# Altium PCB Copy of PCB2.PcbDoc
Units mil, origin at the board's own origin, x right, y up, seen from the top; angles counter-clockwise.
Board outline 6000 x 4000 mil, 2 copper layers (Top Layer, Bottom Layer); 21 components, 29 nets, 114 pads, 3 vias.
Unrouted connection lines stored in the file: 7.
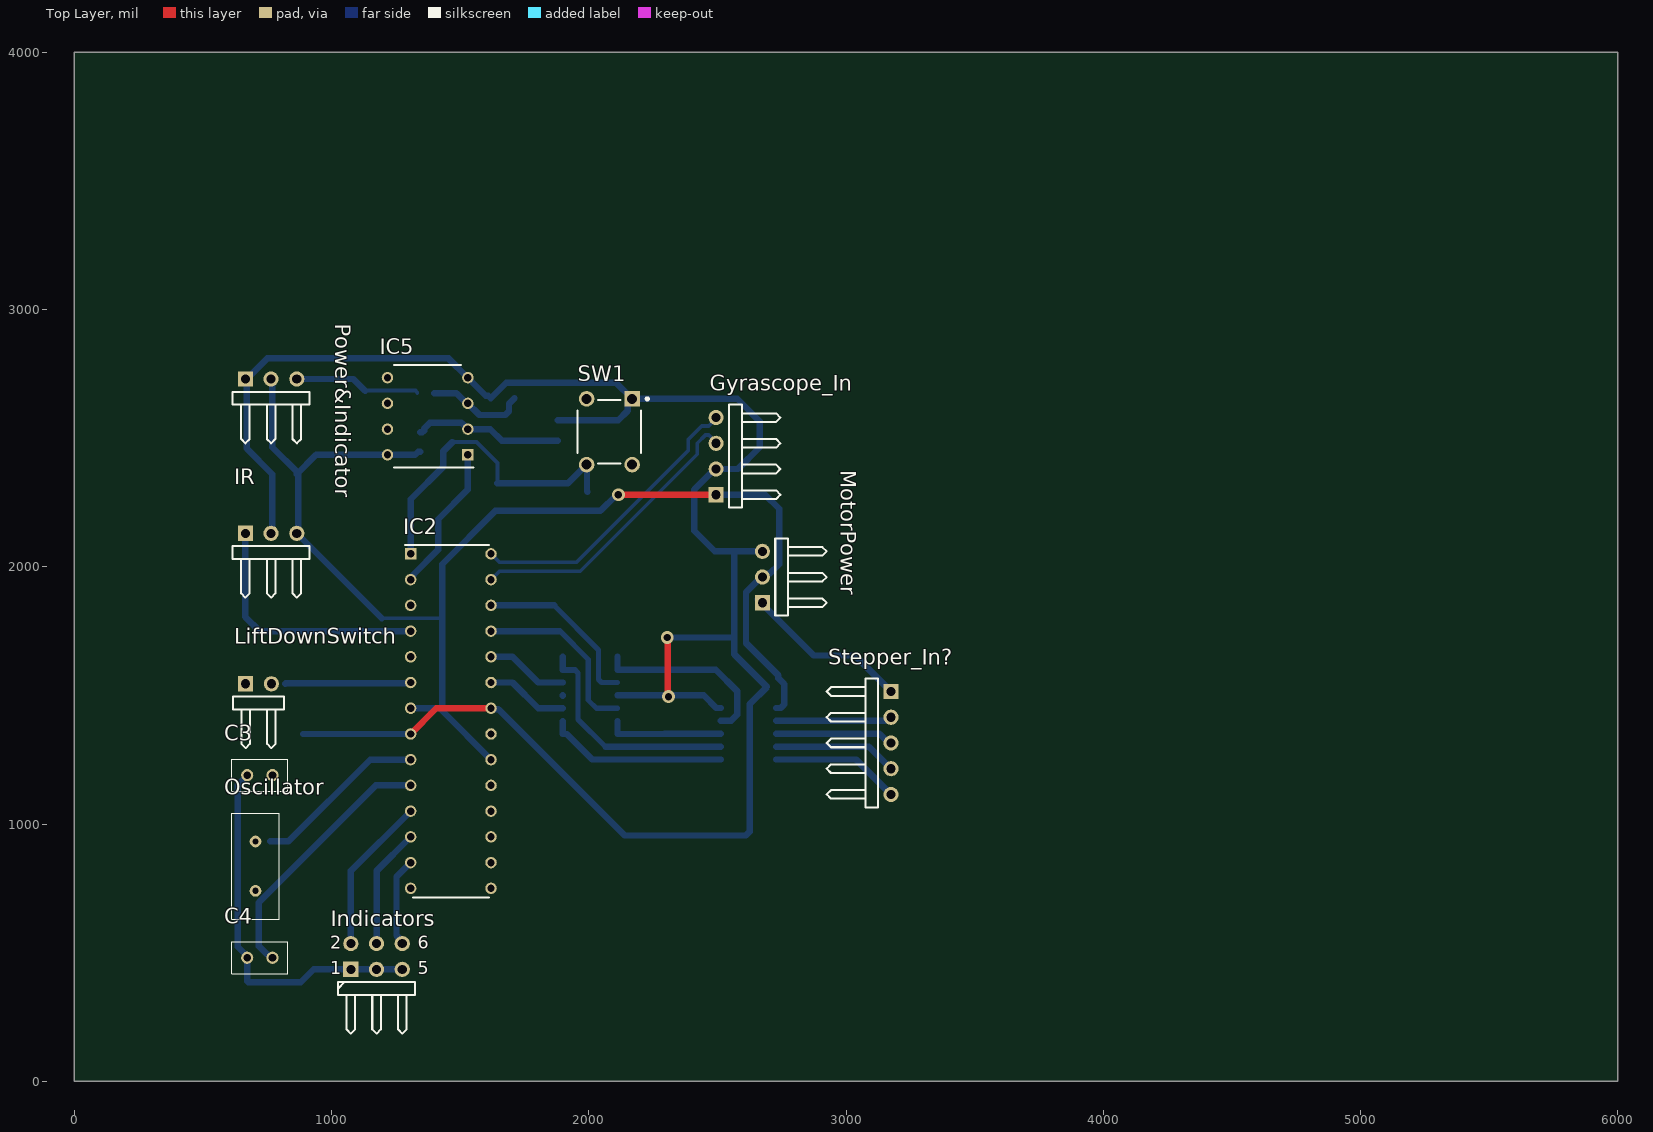
[diagram p0: Top Layer view]
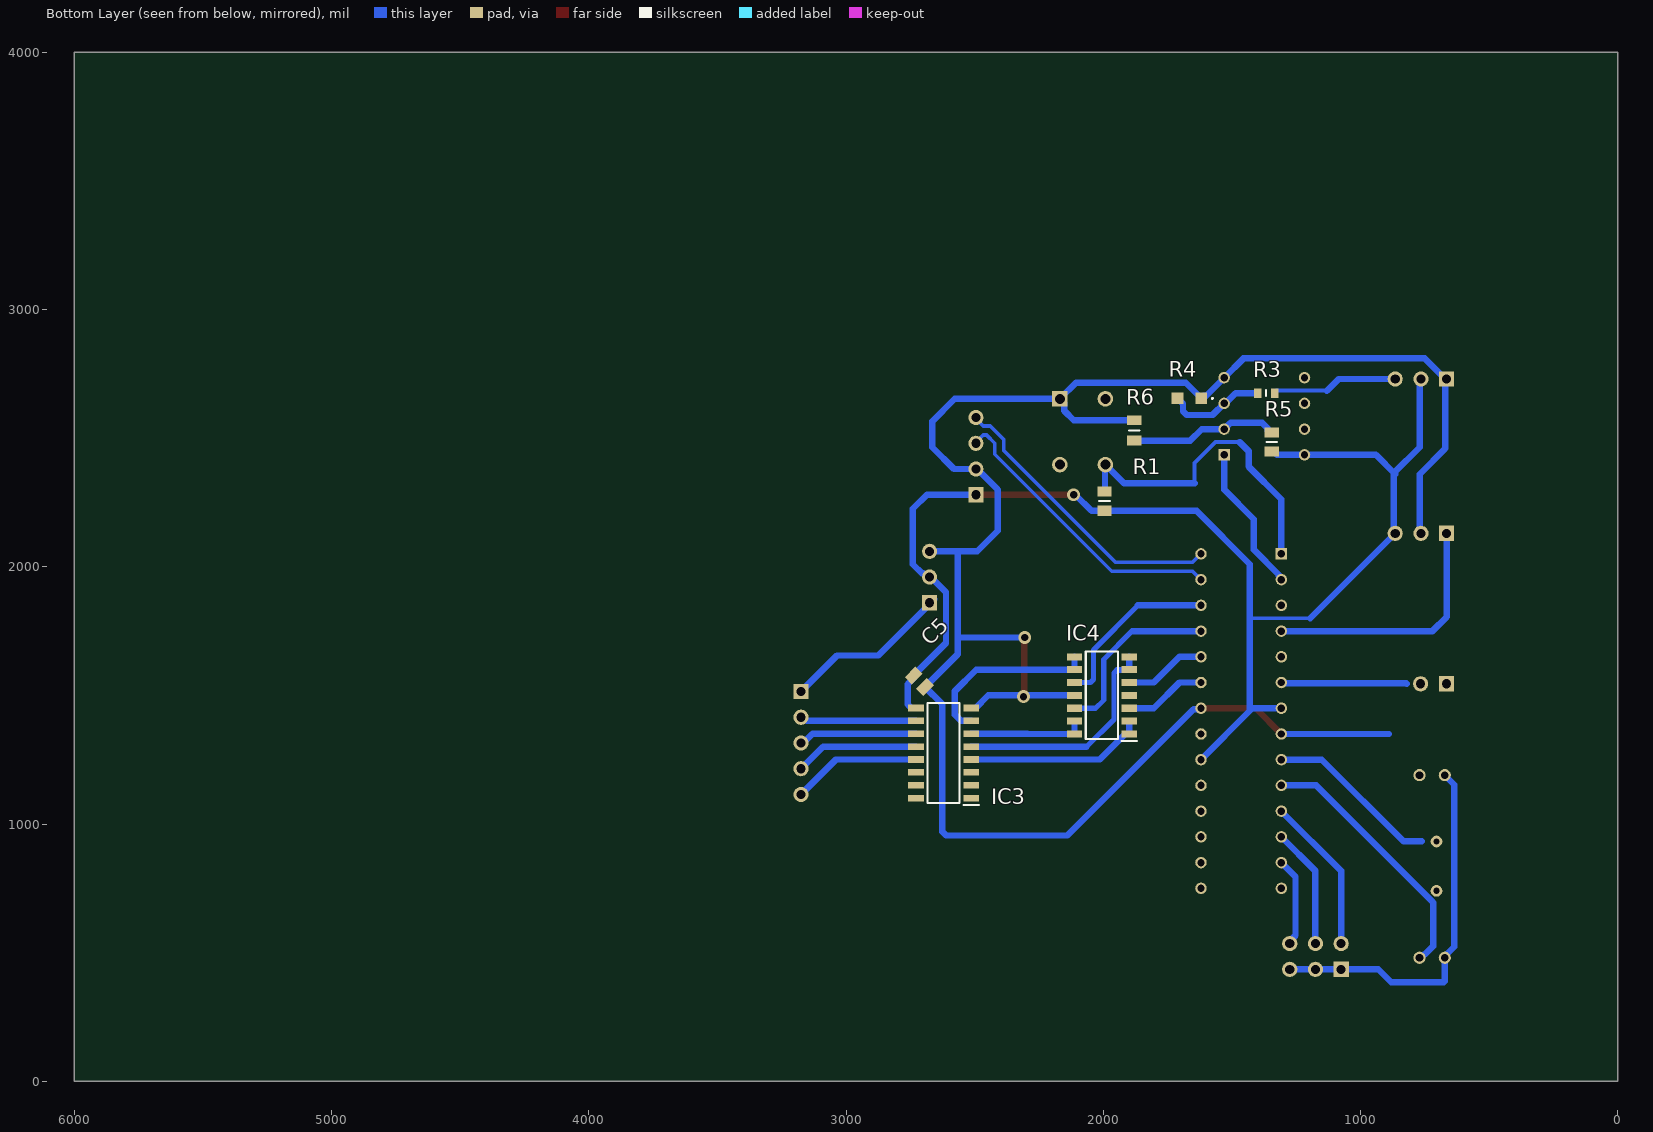
[diagram p1: Bottom Layer view, seen from below]

## Layer stack, top to bottom
Top Solder: solder mask 0.4, Solder Resist, Dk 3.5
Top Layer: signal copper 1.4
Dielectric 1: dielectric 12.6, FR-4, Dk 4.8
Bottom Layer: signal copper 1.4
Bottom Solder: solder mask 0.4, Solder Resist, Dk 3.5

## Board outline
0,0 6000,0 6000,4000 0,4000

## Design rules (kind name [scope] priority, off if disabled: settings)
Clearance [All] p1: gap=20 ignorepadtopadclearanceinfootprint=FALSE
DiffPairsRouting [All] p1: maxlimit=20 minlimit=20 mostfreqgap=20 toplayer_minwidth=15 toplayer_maxwidth=15 toplayer_prefwidth=15 bottomlayer_minwidth=15 bottomlayer_maxwidth=15 bottomlayer_prefwidth=15 maxuncoupledlength=500
PolygonConnect [All] p1: connectstyle=Relief reliefconductorwidth=10 reliefentries=4 polygonreliefangle="90 Angle" airgapwidth=10
RoutingVias [All] p1: holewidth=28 width=50 viastyle="Through Hole" minholewidth=28 minwidth=50 maxholewidth=28 maxwidth=50
SolderMaskExpansion [All] p1: expansion=4 istentingtop=FALSE
Width [All] p1: maxlimit=30 minlimit=10 preferedwidth=25
29 further rules are at their usual default settings.

## Classes and differential pairs
differential pair class I2C: I2C
differential pair I2C: +I2C_P -I2C_N

## Components (designator, comment, footprint, x,y, rotation, side; value= is the part's Value field where it differs from the comment)
C3 "RDE5C2J220J2M1H03A" RCE5C1H104J2A2H03B 672.09,1190 r0 top
C4 "RDE5C2J220J2M1H03A" RCE5C1H104J2A2H03B 672.09,480 r0 top
C5 "C0805C912G4HACTU" CAPC2012X88N 2715,1555 r45 bottom
Gyrascope_In "Header 4H" HDR1X4H 2495,2280 r90 top
IC2 "ATMEGA328P-PN" DIP794W53P254L3467H457Q28N 1463.74,1400 r0 top
IC3 "ULN2003ADR2G" SOIC127P600X175-16N 2620.86,1275.86 r0 bottom
IC4 "LM324WDT" SOIC127P600X175-14N 2005,1500 r0 bottom
IC5 "TL072ACP" DIP794W53P254L959H508Q8N 1373.7,2585 r180 top
Indicators "Header 3X2H" HDR2X3H 1075,435 r0 top
IR "Header 3H" HDR1X3H 665,2130 r0 top
LiftDownSwitch "Header 2H" HDR1X2H 666.06,1545 r0 top
MotorPower "Header 3H" HDR1X3H 2675,1860 r90 top
Oscillator "ECS-160-18-4X-CKM" ECS160184XCKM 704.57,932.13 r270 top
Power&Indicator "Header 3H" HDR1X3H 665,2730 r0 top
R1 "" RESC2012X60N 1995,2255 r90 bottom
R3 "SDR03EZPF1001" RESC1608X55N 1366.53,2675 r180 bottom
R4 "ERA-6ARB1401V" ERA6A_(0805) 1665,2655 r0 bottom
R5 "CHP0805AFX-1001ELF" RESC2012X60N 1345,2485 r270 bottom
R6 "CRCW08052K00FKEBC" RESC2012X50N 1880,2530 r90 bottom
Stepper_In? "Header 5H" HDR1X5H 3175,1515 r270 top
SW1 "" FP-2-1825910-6-MFG 2080,2525 r0 top

## Footprints (in the part's own frame and the unit in brackets; to place one, negate y for a bottom-side part, rotate by r counter-clockwise, add the part's x,y. Pads: shape width x height; smd on the part's side, far side on the other; paste and mask are expansions set on the pad)
CAPC2012X88N [mm]
  rect 1.02x1.47 smd: 1(-0.8,0) 2(0.8,0)
  body extent -1,-0.62 1,0.62, height 0.88
DIP794W53P254L959H508Q8N [mm]
  rect 1.13x1.13 hole 0.73: 1(-3.97,3.81)
  round 1.13 hole 0.73: 2(-3.97,1.27) 3(-3.97,-1.27) 4(-3.97,-3.81) 5(3.97,-3.81) 6(3.97,-1.27) 7(3.97,1.27) 8(3.97,3.81)
  silkscreen extent -4.54,-5.08 3.3,5.08, body extent -4.1,-4.64 4.1,4.64, height 4.21
DIP794W53P254L3467H457Q28N [mil]
  rect 44.61x44.61 hole 28.86: 1(-156.26,650)
  round 44.61 hole 28.86: 2(-156.26,550) 3(-156.26,450) 4(-156.26,350) 5(-156.26,250) 6(-156.26,150) 7(-156.26,50) 8(-156.26,-50) 9(-156.26,-150) 10(-156.26,-250) 11(-156.26,-350) 12(-156.26,-450) 13(-156.26,-550) 14(-156.26,-650) 15(156.26,-650) 16(156.26,-550) 17(156.26,-450) 18(156.26,-350) 19(156.26,-250) 20(156.26,-150) 21(156.26,-50) 22(156.26,50) 23(156.26,150) 24(156.26,250) 25(156.26,350) 26(156.26,450) 27(156.26,550) 28(156.26,650)
  silkscreen extent -179,-685 147,685, body extent -161,-682 161,683, height 180
ECS160184XCKM [mm]
  round 1.155 hole 0.63: 1(0,0) 2(4.88,0)
  silkscreen extent -2.81,-2.33 7.69,2.33, body extent -3.23,-2.32 8.12,2.32, height 3.5
ERA6A_(0805) [mm]
  rect 1.15x1.15 smd: 1(-1.175,0) 2(1.175,0)
  silkscreen extent -2.32,-0.05 -2.22,0.05, body extent -1,-0.63 1,0.63, height 0.5
FP-2-1825910-6-MFG [mm]
  rect 1.54x1.54 hole 0.99 paste-1000 mask+0: 1(2.25,3.25)
  round 1.54 hole 0.99 paste-1000 mask+0: 2(2.25,-3.25) 3(-2.25,3.25) 4(-2.25,-3.25)
  silkscreen extent -3.14,-3.14 3.87,3.37, body extent -3.24,-4.12 3.24,4.12, height 0.25
HDR1X2H [mm] "Connector; Header; 2 Position; Right Angle"
  rect 1.5x1.5 hole 0.9: 1(0,0)
  round 1.5 hole 0.9: 2(2.54,0)
  silkscreen extent -1.27,-6.35 3.81,-1.27, body extent -1.4,-3.17 3.68,3.17, height 10.16
HDR1X3H [mm] "Connector; Header; 3 Position; Right Angle"
  rect 1.5x1.5 hole 0.9: 1(0,0)
  round 1.5 hole 0.9: 2(2.54,0) 3(5.08,0)
  silkscreen extent -1.27,-6.35 6.35,-1.27, body extent -1.14,-2.29 6.48,4.06, height 10.18
HDR1X4H [mm] "Connector; Header; 4 Position; Right Angle"
  rect 1.5x1.5 hole 0.9: 1(0,0)
  round 1.5 hole 0.9: 2(2.54,0) 3(5.08,0) 4(7.62,0)
  silkscreen extent -1.27,-6.35 8.89,-1.27
HDR1X5H [mm] "Connector; Header; 5 Position; Right Angle"
  rect 1.5x1.5 hole 0.9: 1(0,0)
  round 1.5 hole 0.9: 2(2.54,0) 3(5.08,0) 4(7.62,0) 5(10.16,0)
  silkscreen extent -1.27,-6.35 11.43,-1.27
HDR2X3H [mm] "Connector; Header; 3x2 Position; Right Angle"
  rect 1.5x1.5 hole 0.9: 1(0,0)
  round 1.5 hole 0.9: 2(0,2.54) 3(2.54,0) 4(2.54,2.54) 5(5.08,0) 6(5.08,2.54)
  silkscreen extent -1.27,-6.35 6.35,-1.27, body extent -0.4,-0.69 5.6,3.31, height 4.01
RCE5C1H104J2A2H03B [mm]
  round 1.2 hole 0.75: 1(0,0) 2(2.5,0)
  silkscreen extent -1.5,-1.58 4,1.58, body extent -1.5,-1.5 4,1.65, height 4.5
RESC1608X55N [mm]
  rect 0.75x0.95 smd: 1(-0.85,0) 2(0.85,0)
  silkscreen extent 0,-0.3 0,0.3, body extent -0.8,-0.4 0.8,0.4, height 0.55
RESC2012X50N [mm]
  rect 0.95x1.45 smd: 1(-1,0) 2(1,0)
  silkscreen extent 0,-0.53 0,0.53, body extent -1.02,-0.63 1.02,0.63, height 0.5
RESC2012X60N [mm]
  rect 1x1.4 smd: 1(-0.95,0) 2(0.95,0)
  silkscreen extent 0,-0.53 0,0.53, body extent -1,-0.63 1,0.63, height 0.6
SOIC127P600X175-14N [mm]
  rect 1.525x0.7 smd: 1(-2.712,3.81) 2(-2.712,2.54) 3(-2.712,1.27) 4(-2.712,0) 5(-2.712,-1.27) 6(-2.712,-2.54) 7(-2.712,-3.81) 8(2.712,-3.81) 9(2.712,-2.54) 10(2.712,-1.27) 11(2.712,0) 12(2.712,1.27) 13(2.712,2.54) 14(2.712,3.81)
  silkscreen extent -3.47,-4.33 1.6,4.51, body extent -3,-4.33 3,4.33, height 1.75
SOIC127P600X175-16N [mm]
  rect 1.55x0.65 smd: 1(-2.725,4.445) 2(-2.725,3.175) 3(-2.725,1.905) 4(-2.725,0.635) 5(-2.725,-0.635) 6(-2.725,-1.905) 7(-2.725,-3.175) 8(-2.725,-4.445) 9(2.725,-4.445) 10(2.725,-3.175) 11(2.725,-1.905) 12(2.725,-0.635) 13(2.725,0.635) 14(2.725,1.905) 15(2.725,3.175) 16(2.725,4.445)
  silkscreen extent -3.5,-4.95 1.6,5.12, body extent -3,-4.95 3,4.95, height 1.75

## Part data
C3 C4: "Capacitor", Manufacturer_Name="Murata Electronics", Mouser Part Number=81-RDE5C2J220J2M1H3A, Datasheet Link=https://psearch.en.murata.com/capacitor/product/RDE5C2J220J2M1H03A.html, Height=5.5mm, Manufacturer_Part_Number=RDE5C2J220J2M1H03A, Mouser Price/Stock=https://www.mouser.co.uk/ProductDetail/Murata-Electronics/RDE5C2J220J2M1H03A?qs=5aG0NVq1C4wmVHtRKJ01XA%3D%3D
C5: "Capacitor", Manufacturer_Name=Kemet, Mouser Part Number=80-C0805C912G4HACTU, Datasheet Link=https://www.kemet.com/specsheet/C0805C912G4HACTU, Height=0.88mm, Manufacturer_Part_Number=C0805C912G4HACTU, Mouser Price/Stock=https://www.mouser.co.uk/ProductDetail/KEMET/C0805C912G4HACTU?qs=W0yvOO0ixfHJmyB%252BYCP7IQ%3D%3D
Gyrascope_In: "Header, 4-Pin, Right Angle", LatestRevisionDate=17-Jul-2002, LatestRevisionNote="Re-released for DXP Platform.", Publisher="Altium Limited"
IC2: "Integrated Circuit", Manufacturer_Name=Microchip, Mouser Part Number=556-ATMEGA328P-PN, Arrow Part Number=ATMEGA328P-PN, Arrow Price/Stock=https://www.arrow.com/en/products/atmega328p-pn/microchip-technology?region=nac, Datasheet Link=https://datasheet.datasheetarchive.com/originals/distributors/Datasheets_SAMA/81e6b951babeaaddc9de6b0e081ba8bf.pdf, Height=4.572mm, Manufacturer_Part_Number=ATMEGA328P-PN, Mouser Price/Stock=https://www.mouser.co.uk/ProductDetail/Microchip-Technology-Atmel/ATMEGA328P-PN?qs=6Dg1WZIWLC4IRXxsq4v5tA%3D%3D
IC3: "Integrated Circuit", Manufacturer_Name="ON Semiconductor", Mouser Part Number=863-ULN2003ADR2G, Arrow Part Number=ULN2003ADR2G, Arrow Price/Stock=https://www.arrow.com/en/products/uln2003adr2g/on-semiconductor?region=europe, Datasheet Link=http://www.onsemi.com/pub/Collateral/ULN2003A-D.PDF, Height=1.75mm, Manufacturer_Part_Number=ULN2003ADR2G, Mouser Price/Stock=https://www.mouser.co.uk/ProductDetail/onsemi/ULN2003ADR2G?qs=t2BMfLoP1KRgd83C6tnDAg%3D%3D
IC4: "Integrated Circuit", Manufacturer_Name=STMicroelectronics, Mouser Part Number=511-LM324WDT, Datasheet Link=https://co.mouser.com/datasheet/2/389/lm224a-1849701.pdf, Height=1.75mm, Manufacturer_Part_Number=LM324WDT, Mouser Price/Stock=https://www.mouser.co.uk/ProductDetail/STMicroelectronics/LM324WDT?qs=sjzR5wbTsNodE9OFOWodlw%3D%3D
IC5: "Integrated Circuit", Manufacturer_Name="Texas Instruments", Mouser Part Number=595-TL072ACP, Arrow Part Number=TL072ACP, Arrow Price/Stock=https://www.arrow.com/en/products/tl072acp/texas-instruments?region=nac, Datasheet Link=http://www.ti.com/lit/ds/symlink/tl071a.pdf, Height=5.08mm, Manufacturer_Part_Number=TL072ACP, Mouser Price/Stock=https://www.mouser.co.uk/ProductDetail/Texas-Instruments/TL072ACP?qs=0OT4q4QBUTLFvIZ%252B%2FvrwoQ%3D%3D
Indicators: "Header, 3-Pin, Dual row, Right Angle", LatestRevisionDate=17-Jul-2002, LatestRevisionNote="Re-released for DXP Platform.", Publisher="Altium Limited"
IR MotorPower Power&Indicator: "Header, 3-Pin, Right Angle", LatestRevisionDate=17-Jul-2002, LatestRevisionNote="Re-released for DXP Platform.", Publisher="Altium Limited"
LiftDownSwitch: "Header, 2-Pin, Right Angle", LatestRevisionDate=17-Jul-2002, LatestRevisionNote="Re-released for DXP Platform.", Publisher="Altium Limited"
Oscillator: "Crystal or Oscillator", Manufacturer_Name=ECS, Mouser Part Number=520-ECS160-18-4X-CKM, Arrow Part Number=ECS-160-18-4X-CKM, Arrow Price/Stock=https://www.arrow.com/en/products/ecs-160-18-4x-ckm/ecs-international?region=nac, Datasheet Link=https://www.mouser.be/datasheet/2/122/hc-49usx-791.pdf, Height=3.5mm, Manufacturer_Part_Number=ECS-160-18-4X-CKM, Mouser Price/Stock=https://www.mouser.co.uk/ProductDetail/ECS/ECS-160-18-4X-CKM?qs=7MVldsJ5UawYqyimirccKw%3D%3D
R1: library part CHP0805-FX-1002ELF, "Resistor", Manufacturer_Name=Bourns, Mouser Part Number=652-CHP0805FX1002ELF, Datasheet Link=https://ms.componentsearchengine.com/Datasheets/1/CHP0805-FX-1002ELF.pdf, Height=0.6mm, Manufacturer_Part_Number=CHP0805-FX-1002ELF, Mouser Price/Stock=https://www.mouser.co.uk/ProductDetail/Bourns/CHP0805-FX-1002ELF?qs=lc2O%252BfHJPVaDI6gsPdDtfw%3D%3D
R3: "Resistor", Manufacturer_Name="ROHM Semiconductor", Mouser Part Number=755-SDR03EZPF1001, Datasheet Link=https://mouser.componentsearchengine.com/Datasheets/1/SDR03EZPF1001.pdf, Height=0.55mm, Manufacturer_Part_Number=SDR03EZPF1001, Mouser Price/Stock=https://www.mouser.co.uk/ProductDetail/ROHM-Semiconductor/SDR03EZPF1001?qs=byeeYqUIh0NXXxDsimC7bA%3D%3D
R4: "Resistor", Manufacturer_Name=Panasonic, Mouser Part Number=667-ERA-6ARB1401V, Datasheet Link=http://industrial.panasonic.com/cdbs/www-data/pdf/RDM0000/AOA0000C307.pdf, Height=0.6mm, Manufacturer_Part_Number=ERA-6ARB1401V, Mouser Price/Stock=https://www.mouser.com/Search/Refine.aspx?Keyword=667-ERA-6ARB1401V
R5: "Resistor", Manufacturer_Name=Bourns, Mouser Part Number=652-CHP0805AFX1001EL, Arrow Part Number=CHP0805AFX-1001ELF, Arrow Price/Stock=https://www.arrow.com/en/products/chp0805afx-1001elf/bourns?region=nac, Datasheet Link=https://www.mouser.com/datasheet/2/54/chp-a-1858677.pdf, Height=0.6mm, Manufacturer_Part_Number=CHP0805AFX-1001ELF, Mouser Price/Stock=https://www.mouser.co.uk/ProductDetail/Bourns/CHP0805AFX-1001ELF?qs=BJlw7L4Cy7%2F%2FdiZX3l7oWQ%3D%3D
R6: "Resistor", Manufacturer_Name=Vishay, Mouser Part Number=71-CRCW08052K00FKEBC, Arrow Part Number=CRCW08052K00FKEBC, Arrow Price/Stock=https://www.arrow.com/en/products/crcw08052k00fkebc/vishay?region=nac, Datasheet Link=https://www.arrow.com/en/products/crcw08052k00fkebc/vishay?region=nac, Height=0.5mm, Manufacturer_Part_Number=CRCW08052K00FKEBC, Mouser Price/Stock=https://www.mouser.co.uk/ProductDetail/Vishay-Dale/CRCW08052K00FKEBC?qs=wd5RIQLrsJimvZ2z7rs9jQ%3D%3D
Stepper_In?: "Header, 5-Pin, Right Angle", LatestRevisionDate=17-Jul-2002, LatestRevisionNote="Re-released for DXP Platform.", Publisher="Altium Limited"
SW1: library part CMP-03407-000025-1, "SWITCH TACTILE SPST-NO 0.05A 24V", Actuator Color=Brown, Contact Current Rating=50mA, Max Operating Temperature=85°C, Min Operating Temperature=-35°C, Operating Force=100gf, Voltage Rating (DC)=24V, Actuator Length=0.37inch, Actuator Material=Nylon, Actuator Type=Standard, Contact Material="Copper Alloy", Contact Plating=Silver, ELV=Compliant, Illumination Type=Non-Illuminated, Lead Free="Lead Free", Length=5.99mm, Max Current Rating=50mA, Mechanical Life=100000Cycles, Mount="Through Hole", Orientation=Straight, Packaging="Loose Piece", RoHS Compliant=Yes, Series=FSMJ, Switch Function=Off-Mom, Switch Travel=0.25mm, Termination="PC Pin", Throw Configuration=SPST, Type=Switch

## Via types
v1: diameter 50, hole 28, Top Layer to Bottom Layer, 3 vias

## Nets (pads, with @x,y where several pads share a name; then routed paths per layer and width w, separated by ;. In a path a pad name is that pad's centre, name@x,y a point inside that pad or via, vN(x,y) a via of type N, cw(c..) or ccw(c..) an arc to the next point about the centre after c; other vN are vias at no path point)
5V_DC: C5.2 Gyrascope_In.1 IC2.7 IC2.20 IC3.9 IC4.4 IC5.8 IR.3 MotorPower.2 Power&Indicator.2 R1.1 R5.2 | length 5205.2
  Top Layer w25: v1(2115,2280) Gyrascope_In.1
  Bottom Layer w15: 1195,1800 1430,1800
  Bottom Layer w25: Power&Indicator.2@770,2730 770,2465 870,2365 870,2135 IR.3 1195,1800 ; 865,2360 940,2435 IC5.8 1324.53,2435 1337.13,2447.6 R5.2 ; IC2.7 1420,1450 1430,1440 ; IC2.20 1430,1440 ; IC4.4 IC4.4@1899.51,1498.72 ; v1(2115,2280) 2108.24,2280 2045.41,2217.18 1637.18,2217.18 1430,2010 1430,1800 1430,1440 ; Gyrascope_In.1 2685,2280 2740,2225 2740,2010 2704.9,1974.9 2699.11,1974.9 2682.5,1958.28 2682.5,1952.5 MotorPower.2@2673.8,1952.5 ; MotorPower.2 2669.98,1960 2611.27,1901.29 2611.27,1703.27 C5.2 2737.27,1566.55 2759.89,1543.94 2759.89,1464.89 2745.86,1450.86 IC3.9
Buzzer: IC2.13 Indicators.6 | length 346.9
  Bottom Layer w25: Indicators.6 1275,544.22 1252.68,566.54 1252.68,795.2 IC2.13
GND: C3.1 C4.1 C5.1 Gyrascope_In.2 IC2.8 IC2.22 IC3.8 IC4.11 IC5.4 Indicators.1 Indicators.3 Indicators.5 IR.2 LiftDownSwitch.1 MotorPower.3 Power&Indicator.1 R4.1 R6.2 SW1.1 | length 9584.7
  Top Layer w25: IC2.8 1407.48,1450 IC2.22 ; v1(2305,1725) 2307.5,1722.5 2307.5,1497.5 v1(2310,1495)
  Bottom Layer w25: C3.1 635,1152.91 635,523.11 672.09,486.02 C4.1 672.09,389.3 676.38,385 880.62,385 930.62,435 Indicators.1 Indicators.3 Indicators.5 ; IR.2 770,2135 770,2360 670,2460 670,2730 750,2810 1455,2810 IC5.4 1599.86,2665.14 1608.6,2665.14 R4.1 1679.51,2715.77 2105.77,2715.77 SW1.1 ; 890,1350 IC2.8 ; IC2.22 1623.75,1446.25 1648.95,1446.25 2140,955.2 2610.36,955.2 2625,969.84 2625,1465 C5.1 2566.27,1659.19 2566.27,1725 ; R6.2 R6.2@1889.84,2569.37 ; R6.2@1881.16,2570 2115,2570 2150.77,2605.77 2150.77,2635.14 SW1.1 ; IC4.11 2446.73,1500 2495.86,1450.86 IC3.8 ; v1(2305,1725) 2566.27,1725 ; MotorPower.3 2567.54,2060 ; SW1.1 2577.05,2652.95 2665,2565 2665,2465 2580,2380 Gyrascope_In.2 2489.98,2380 2410,2300.02 2410,2140 2490,2060 2567.54,2060 ; 2566.27,1725 2566.27,2058.73 2567.54,2060
I2C_N: Gyrascope_In.3 IC2.27 | length 1148.9
  Bottom Layer w15: IC2.27 1652.5,1982.5 1967,1982.5 2421.71,2437.21 2421.71,2480.29 2453.92,2512.5 2466.35,2512.5 2495,2483.85 Gyrascope_In.3
I2C_P: Gyrascope_In.4 IC2.28 | length 1148.9
  Bottom Layer w15: IC2.28 1652.5,2017.5 1952.5,2017.5 2386.71,2451.71 2386.71,2494.79 2439.42,2547.5 2466.35,2547.5 2495,2576.15 Gyrascope_In.4
IC5_3.3VIn: IC5.2 R5.1 R6.1 | length 583.9
  Bottom Layer w25: R5.1 1352.87,2522.4 1360.06,2529.59 1360.06,2537.46 1382.6,2560 1505,2560 IC5.2 1617.42,2535 1661.79,2490.63 R6.1
IR_Digital: IC2.4 IR.1 | length 990.3
  Bottom Layer w25: IR.1 665,1805 720,1750 IC2.4
LED_G: IC2.12 Indicators.4 | length 469.9
  Bottom Layer w25: Indicators.4 1175,817.52 IC2.12
LED_R: IC2.11 Indicators.2 | length 611.3
  Bottom Layer w25: Indicators.2 1075,817.52 IC2.11
LiftDownIn: IC2.6 LiftDownSwitch.2 | length 489.6
  Bottom Layer w25: 820,1545 822.5,1547.5 1304.98,1547.5 IC2.6
NetC3_2: C3.2 IC2.9 Oscillator.1 | length 676.7
  Bottom Layer w25: 762.48,932.13 832.13,932.13 1150,1250 IC2.9
NetC4_2: C4.2 IC2.10 Oscillator.2 | length 1016.9
  Bottom Layer w25: C4.2@766.26,478.24 753.37,491.12 751.43,491.12 717.09,525.47 717.09,694.61 1172.48,1150 IC2.10
NetIC2_1: IC2.1 R1.2 SW1.4 | length 1271.9
  Bottom Layer w15: 1470,2485 1563.38,2485 1645,2403.38 1645,2325
  Bottom Layer w25: IC2.1 1307.48,2262.48 1435,2390 1435,2450 1470,2485 ; 1645,2325 1919.37,2325 SW1.4 1993.21,2395.26 1993.21,2294.19 R1.2
NetIC2_2: IC2.2 IC5.1 | length 577.2
  Bottom Layer w25: IC2.2 1307.48,1955.31 1317.28,1965.11 1317.28,1969.23 1415,2066.95 1415,2185 1530,2300 IC5.1
NetIC2_23: IC2.23 IC4.3 | length 319.6
  Bottom Layer w25: IC2.23 1703.65,1550 1803.65,1450 IC4.3
NetIC2_24: IC2.24 IC4.5 | length 319.6
  Bottom Layer w25: IC2.24 1703.65,1650 1803.65,1550 IC4.5
NetIC2_25: IC2.25 IC4.12 | length 708.8
  Bottom Layer w20: 1887.99,1750 1998.25,1639.74 1998.25,1481.4 2029.64,1450 IC4.12
  Bottom Layer w25: IC2.25 1887.99,1750
NetIC2_26: IC2.26 IC4.10 | length 683.4
  Bottom Layer w20: 1865,1850 2038.25,1676.75 2038.25,1561.72 2049.96,1550 IC4.10
  Bottom Layer w25: IC2.26 1865,1850
NetIC3_4: IC3.4 IC4.1 IC4.2 | length 706.4
  Bottom Layer w25: IC4.2 IC4.1 1914.47,1350 2013.6,1250.86 IC3.4
NetIC3_5: IC3.5 IC4.6 IC4.7 | length 895.4
  Bottom Layer w20: 1946.28,1598.72 1958.25,1586.75 1958.25,1406.75 2065,1300
  Bottom Layer w25: IC4.7 IC4.6 1899.51,1598.72 1946.28,1598.72 ; 2065,1300 2200,1300 2200.86,1300.86 IC3.5
NetIC3_6: IC3.6 IC4.13 IC4.14 | length 452.2
  Bottom Layer w25: IC4.13 IC4.14 2295,1350 2295.86,1350.86 IC3.6
NetIC3_7: IC3.7 IC4.8 IC4.9 | length 714.4
  Bottom Layer w25: IC4.8 IC4.9 2493.53,1600 2576.59,1516.93 2576.59,1424.61 2553.14,1401.16 2513.88,1401.16 IC3.7
NetIC3_10: IC3.10 Stepper_In?.2 | length 452.7
  Bottom Layer w25: IC3.10 3151.65,1400.86 3165.78,1415 Stepper_In?.2
NetIC3_11: IC3.11 Stepper_In?.3 | length 461.7
  Bottom Layer w25: IC3.11 3129.92,1350.86 3165.78,1315 Stepper_In?.3
NetIC3_12: IC3.12 Stepper_In?.4 | length 482.4
  Bottom Layer w25: IC3.12 3089.14,1300.86 Stepper_In?.4
NetIC3_13: IC3.13 Stepper_In?.5 | length 503.1
  Bottom Layer w25: IC3.13 3039.14,1250.86 Stepper_In?.5
NetIC5_3: IC5.3 R3.1 R4.2 | length 390.4
  Bottom Layer w25: R3.1 1485.51,2675 1525.51,2635 IC5.3 1575,2590 1675.36,2590 1690,2604.64 1690,2633.74 R4.2
NetMotorPower_1: MotorPower.1 Stepper_In?.1 | length 667.3
  Bottom Layer w25: MotorPower.1@2656.27,1873.73 2875,1655 3035,1655 Stepper_In?.1
NetPower&Indicator_3: Power&Indicator.3 R3.2 | length 487.3
  Bottom Layer w15: 1130.26,2684.74 1325.81,2684.74 1333.07,2677.48 R3.2
  Bottom Layer w25: Power&Indicator.3@870,2730 1085,2730 1130.26,2684.74
pads on no net: IC2.3 IC2.5 IC2.14 IC2.15 IC2.16 IC2.17 IC2.18 IC2.19 IC2.21 IC3.1 IC3.2 IC3.3 IC3.14 IC3.15 IC3.16 IC5.5 IC5.6 IC5.7 SW1.2 SW1.3

## Text inside footprints (layer, text, board x,y; h text height)
Indicators: Top Overlay "6" at 1335,515 h50; Top Overlay "5" at 1335,415 h50; Top Overlay "1" at 995,415 h50; Top Overlay "2" at 995,515 h50